# Altium PCB shift_reg_breakout.PcbDoc
Units mil, origin at the board's own origin, x right, y up, seen from the top; angles counter-clockwise.
Board outline 800 x 870 mil, 2 copper layers (Top Layer, Bottom Layer); 3 components, 16 nets, 32 pads, 0 vias.
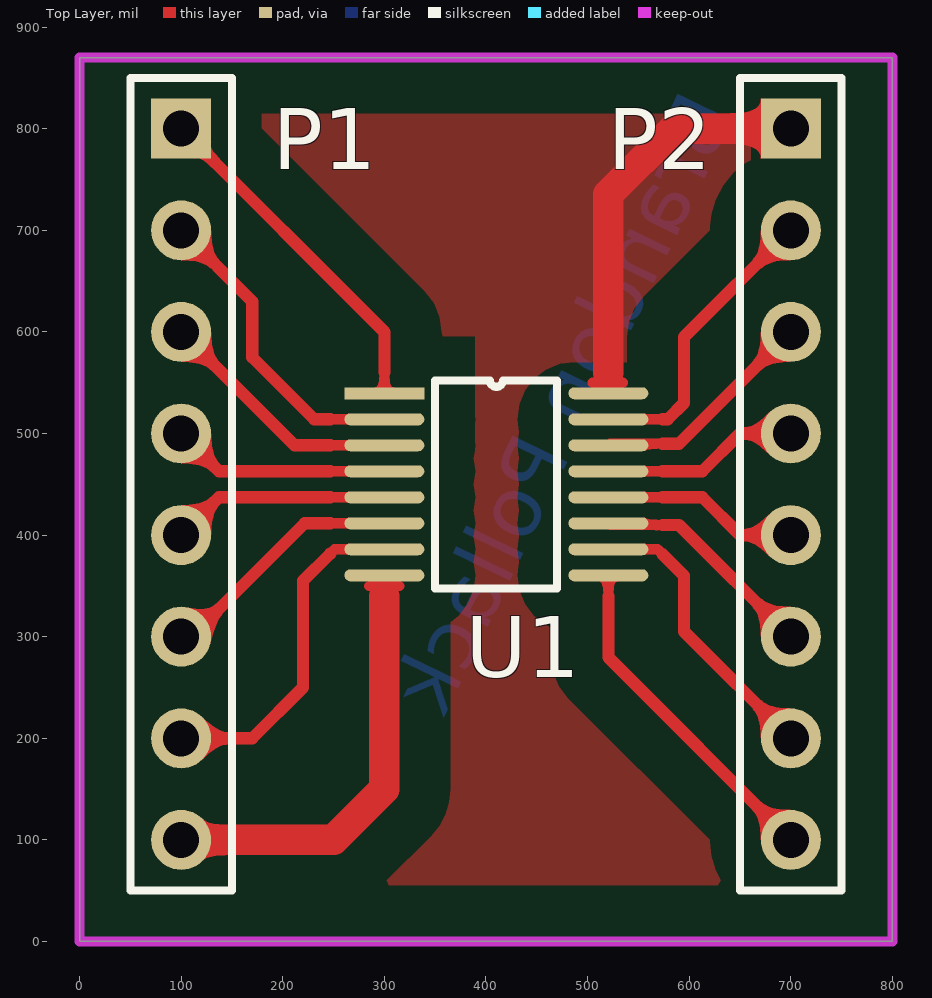
[diagram p0: Top Layer view]
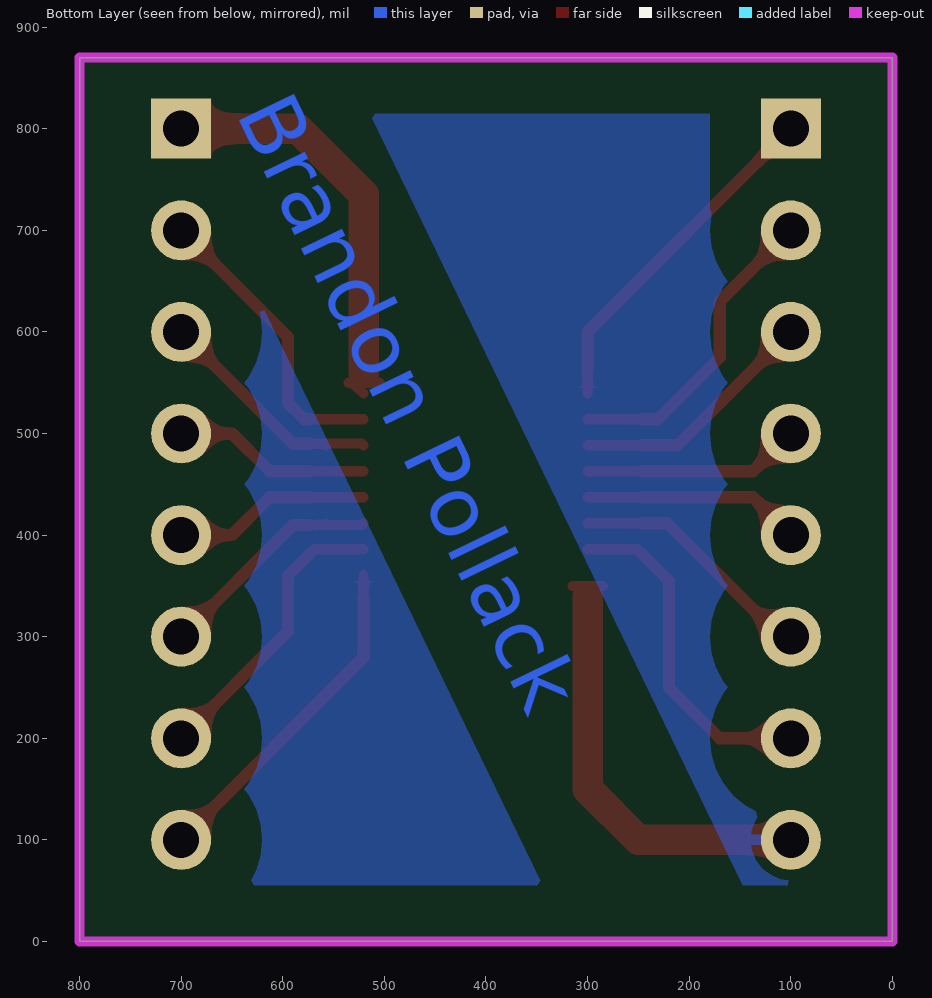
[diagram p1: Bottom Layer view, seen from below]

## Layer stack, top to bottom
Top Solder: solder mask 0.4, Solder Resist, Dk 3.5
Top Layer: signal copper 1.4
Dielectric 1: dielectric 12.6, FR-4, Dk 4.8
Bottom Layer: signal copper 1.4
Bottom Solder: solder mask 0.4, Solder Resist, Dk 3.5

## Board outline
0,0 800,0 800,870 0,870

## Design rules (kind name [scope] priority, off if disabled: settings)
Clearance POLY [inpoly] p1: gap=50
Clearance [All] p2: gap=10
PolygonConnect [All] p1: connectstyle=Relief reliefconductorwidth=10 reliefentries=4 polygonreliefangle="90 Angle" airgapwidth=10
RoomDefinition NeckDownRoom [InComponentClass('Room Definition 1')] p1: confinementstyle=ConfineIn formatcopy=TRUE lockcomponents=FALSE outline 246.63,340 246.63,560 573.84,560 573.84,340
RoutingVias [All] p1: holewidth=28 width=50 viastyle="Through Hole" minholewidth=28 minwidth=50 maxholewidth=28 maxwidth=50
SolderMaskExpansion [All] p1: expansion=4
Width Room_Neck [TouchesRoom('NeckDownRoom')] p1: maxlimit=20 minlimit=10 preferedwidth=10
Width Power [InNetClass('PWR')] p2: maxlimit=30 minlimit=10 preferedwidth=30
Width [All] p3: maxlimit=20 minlimit=10 preferedwidth=12
30 further rules are at their usual default settings.

## Classes and differential pairs
component class "Room Definition 1": U1
net class PWR: NetP1_8 NetP2_1

## Components (designator, comment, footprint, x,y, rotation, side; value= is the part's Value field where it differs from the comment)
P1 "Header 8" HDR1X8 100,800 r270 top
P2 "Header 8" HDR1X8 700,800 r270 top
U1 "SN74LV165" SOP16_Hand 300,539.57 r0 top locked

## Footprints (in the part's own frame and the unit in brackets; to place one, negate y for a bottom-side part, rotate by r counter-clockwise, add the part's x,y. Pads: shape width x height; smd on the part's side, far side on the other; paste and mask are expansions set on the pad)
HDR1X8 [mm] "Connector; Header; 8 Position"
  rect 1.5x1.5 hole 0.9: 1(0,0)
  round 1.5 hole 0.9: 2(2.54,0) 3(5.08,0) 4(7.62,0) 5(10.16,0) 6(12.7,0) 7(15.24,0) 8(17.78,0)
  silkscreen extent -1.27,-1.27 19.05,1.27
SOP16_Hand [mm]
  rect 2x0.3 smd: 1(0,0)
  oval 2x0.3 smd: 2(0,-0.65) 3(0,-1.3) 4(0,-1.95) 5(0,-2.6) 6(0,-3.25) 7(0,-3.9) 8(0,-4.55) 9(5.6,-4.55) 10(5.6,-3.9) 11(5.6,-3.25) 12(5.6,-2.6) 13(5.6,-1.95) 14(5.6,-1.3) 15(5.6,-0.65) 16(5.6,0)
  silkscreen extent 1.27,-4.87 4.32,0.33

## Part data
P1 P2: "Header, 8-Pin"

## Nets (pads, with @x,y where several pads share a name; then routed paths per layer and width w, separated by ;. In a path a pad name is that pad's centre, name@x,y a point inside that pad or via, vN(x,y) a via of type N, cw(c..) or ccw(c..) an arc to the next point about the centre after c; other vN are vias at no path point)
NetP1_1: P1.1 U1.1 | length 343.3
  Top Layer w10: U1.1 300,560
  Top Layer w12: P1.1 300,600 300,560
NetP1_2: P1.2 U1.2 | length 309.3
  Top Layer w10: 246.63,513.98 U1.2
  Top Layer w12: P1.2 170,630 170,575 231.02,513.98 246.63,513.98
NetP1_3: P1.3 U1.3 | length 246.2
  Top Layer w10: 246.63,488.39 U1.3
  Top Layer w12: P1.3 211.61,488.39 246.63,488.39
NetP1_4: P1.4 U1.4 | length 215.4
  Top Layer w10: 246.63,462.8 U1.4
  Top Layer w12: P1.4 137.2,462.8 246.63,462.8
NetP1_5: P1.5 U1.5 | length 215.4
  Top Layer w10: 246.63,437.2 U1.5
  Top Layer w12: P1.5 137.2,437.2 246.63,437.2
NetP1_6: P1.6 U1.6 | length 236.2
  Top Layer w10: 246.63,411.61 U1.6
  Top Layer w12: P1.6@110,300 221.61,411.61 246.63,411.61
NetP1_7: P1.7 U1.7 | length 338.6
  Top Layer w10: 246.63,381.63 251.02,386.02 U1.7
  Top Layer w12: P1.7 170,200 220,250 220,355 246.63,381.63
NetP1_8: P1.8 U1.8 | length 454.9
  Top Layer w10: 285,350 290,350 ; 300,340 290,350 ; 315,350 290,350
  Top Layer w30: P1.8 250,100 300,150 300,340
NetP2_1: P2.1 U1.16 | length 436.5
  Top Layer w10: 505,550 520.47,550 ; U1.16 530.9,550 ; 520.47,560 520.47,550 ; 535,550 530.9,550 ; 520.47,550 530.9,550
  Top Layer w30: 520.47,560 520.47,735.47 585,800 P2.1
NetP2_2: P2.2 U1.15 | length 294.7
  Top Layer w10: U1.15 573.84,513.98
  Top Layer w12: 573.84,513.98 578.98,513.98 595,530 595,595 P2.2
NetP2_3: P2.3 U1.14 | length 225.8
  Top Layer w10: U1.14 522.09,490 573.84,490
  Top Layer w12: 573.84,490 590,490 P2.3
NetP2_4: P2.4 U1.13 | length 194.9
  Top Layer w10: U1.13 573.84,462.8
  Top Layer w12: 573.84,462.8 612.8,462.8 650,500 P2.4
NetP2_5: P2.5 U1.12 | length 194.9
  Top Layer w10: U1.12 573.84,437.2
  Top Layer w12: 573.84,437.2 612.8,437.2 650,400 P2.5
NetP2_6: P2.6 U1.11 | length 225.8
  Top Layer w10: U1.11 522.09,410 573.84,410
  Top Layer w12: 573.84,410 590,410 P2.6
NetP2_7: P2.7 U1.10 | length 288.8
  Top Layer w10: U1.10 568.98,386.02 573.84,381.16
  Top Layer w12: 573.84,381.16 595,360 595,305 P2.7
NetP2_8: P2.8 U1.9 | length 334.8
  Top Layer w10: 520.47,340 U1.9
  Top Layer w12: 520.47,340 520.47,279.53 P2.8

## Polygon pours and split planes (outlines as drawn)
NetP1_8 on Bottom Layer "Top Layer-No Net" (solid, pour order 2): 0,0 800,0 800,870 0,870 0,0
NetP2_1 on Top Layer "Top Layer-No Net" (solid, pour order 6): 0,0 800,0 800,870 0,870

## Keep-outs
Keep-Out Layer:
  the board outline again, w10

## Other copper
Bottom Layer:
  text "Brandon Pollack" at 646.29,815.14 h60 r64.21